# Altium PCB base-board_v0.PcbDoc (part 3 of 3)
Units mm, origin at the board's own origin, x right, y up, seen from the top; angles counter-clockwise.
Board outline 82.49 x 71.25 mm, 4 copper layers (1 Top Layer, 2 Signal Layer, 3 GND Layer, 4 Bottom Layer), stack 1.57 mm thick; 189 components, 152 nets, 678 pads, 239 vias.
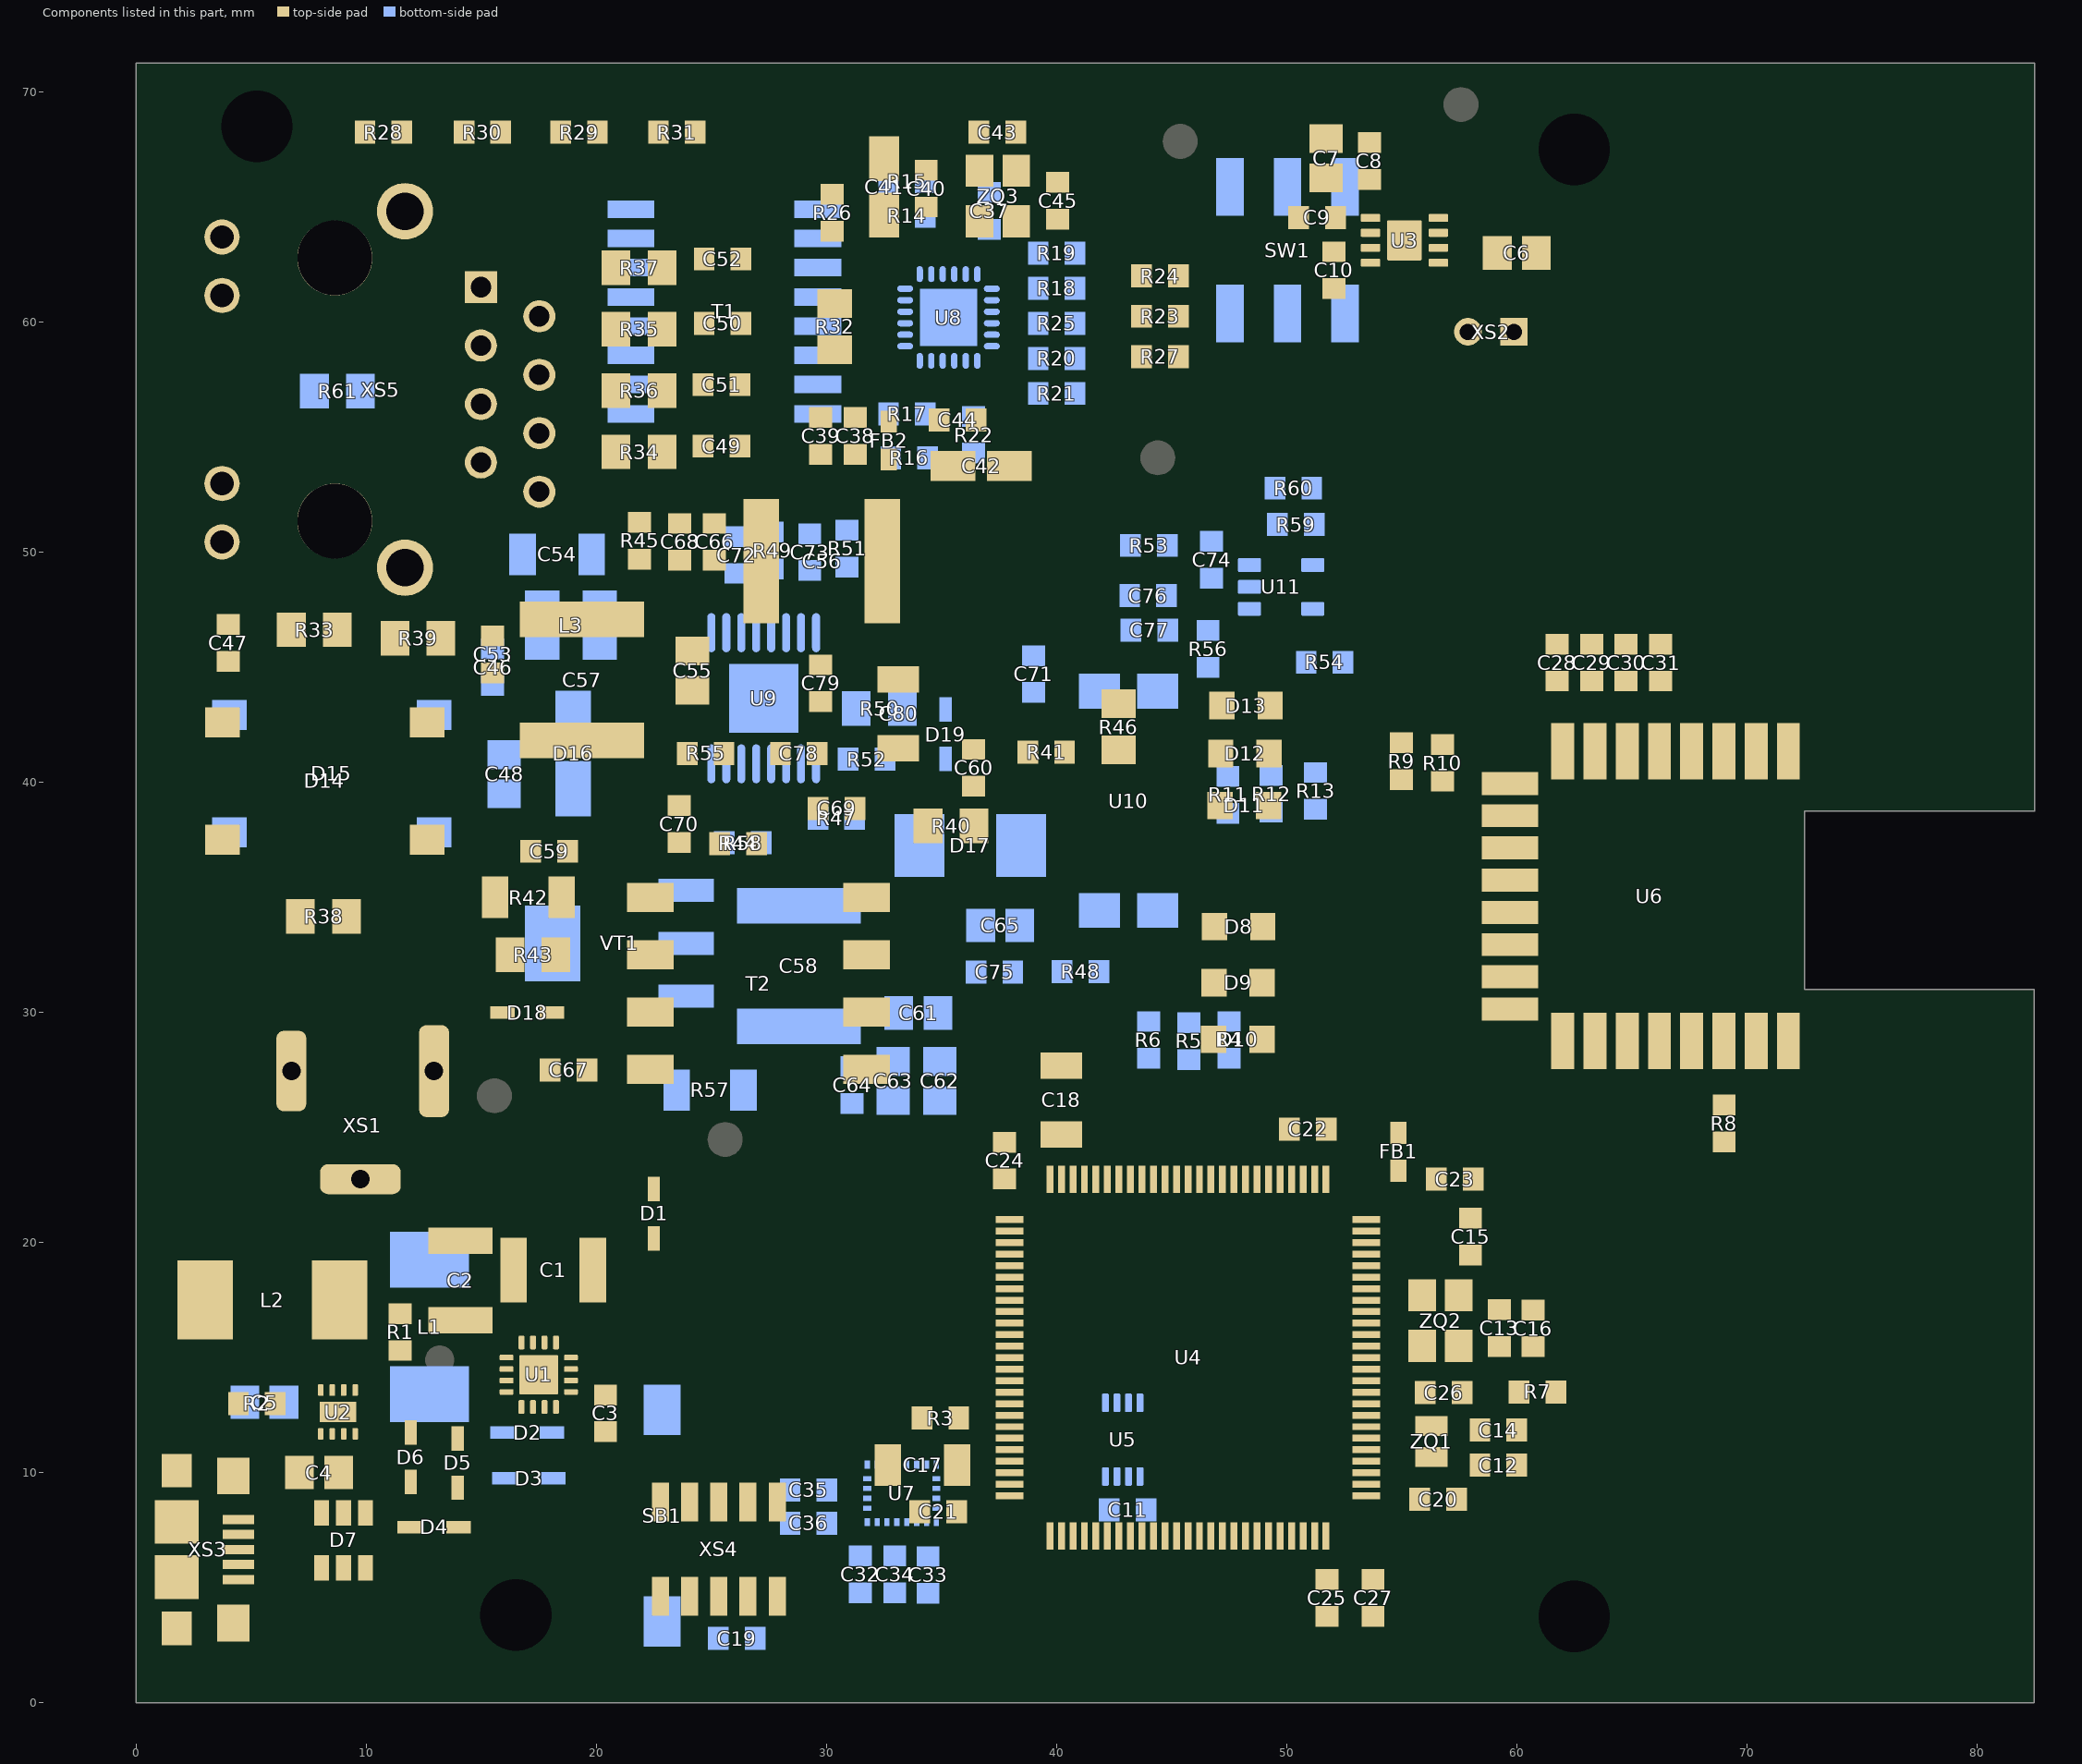
[diagram p5: the components of this part, seen from the top]

## Silkscreen, mask and mechanical layers (free items; w line width, h text height)
Top Overlay:
  circle w0.254: c28.4,16.9 r0.51
  lines w0.127: 14,14.7 14.4,14.7 14.7,14.4 14.7,13.8 15.3,13.2 15.3,11.9
  lines w0.203: 25.6,16.9 27.2,16.9 ; 26.7,16.4 27.2,16.9 ; 26.7,17.4 27.2,16.9 ; 27.9,15.3 28.4,15.8 ; 28.4,14.1 28.4,15.8 ; 28.9,15.3 28.4,15.8
  lines w0.254: 13,11.7 13.2,11.5 ; 28,17.2 28.1,17.2 28.7,16.6 ; 28.1,16.6 28.7,17.2 28.7,17.3 ; 72.5,1.25 72.5,26.25 ; 72.5,43.75 72.5,70
  text "3V3 IN" at 43.275,69 h1
  text "3V3 BAT" at 54.575,67.425 h1
  text "RTLS Base Board 1.0" at 49.7,53.3 h1.27
  text "GND" at 43.1,51.9 h1
  text "VIN" at 14.65,24.325 h1
  text "5V POE" at 26.925,23.975 h1
  text "z" at 28.1,17.9 h1.02
  text "x" at 25.7,17.3 h1.02
  text "y" at 27.3,14.1 h1.02
  text "E5V" at 14.8,11.1 h0.81
Bottom Overlay:
  lines w0.15: 35.1,65.025 35.625,65.025 35.85,65.25 35.85,65.975
  text "bat" at 52,67.8 h1 r270
  text "in" at 47.2,67.7 h1 r270
  text "+" at 57.3,51.9 h1
  text "-" at 59.5,51.8 h1
Board:
  lines w0.254: 82.5,38.75 82.5,71.25 0.01,71.25 0.01,0 82.49,0 82.49,31 72.5,31 72.5,38.75 82.5,38.75 ; 82.5,38.75 82.5,38.75 ; 82.5,38.75 82.5,38.75

## Text inside footprints (layer, text, board x,y; h text height)
XS4: Top Overlay "2" at 29.054,8.623 h0.81; Top Overlay "1" at 29.054,4.123 h0.81; Top Overlay "9" at 21.054,4.123 h0.81; Top Overlay "10" at 20.554,8.623 h0.81